# Altium PCB SensorsTeam5.PcbDoc
Units mm, origin at the board's own origin, x right, y up, seen from the top; angles counter-clockwise.
Board outline 119.38 x 95.25 mm, 2 copper layers (Top Layer, Bottom Layer); 68 components, 47 nets, 261 pads, 10 vias.
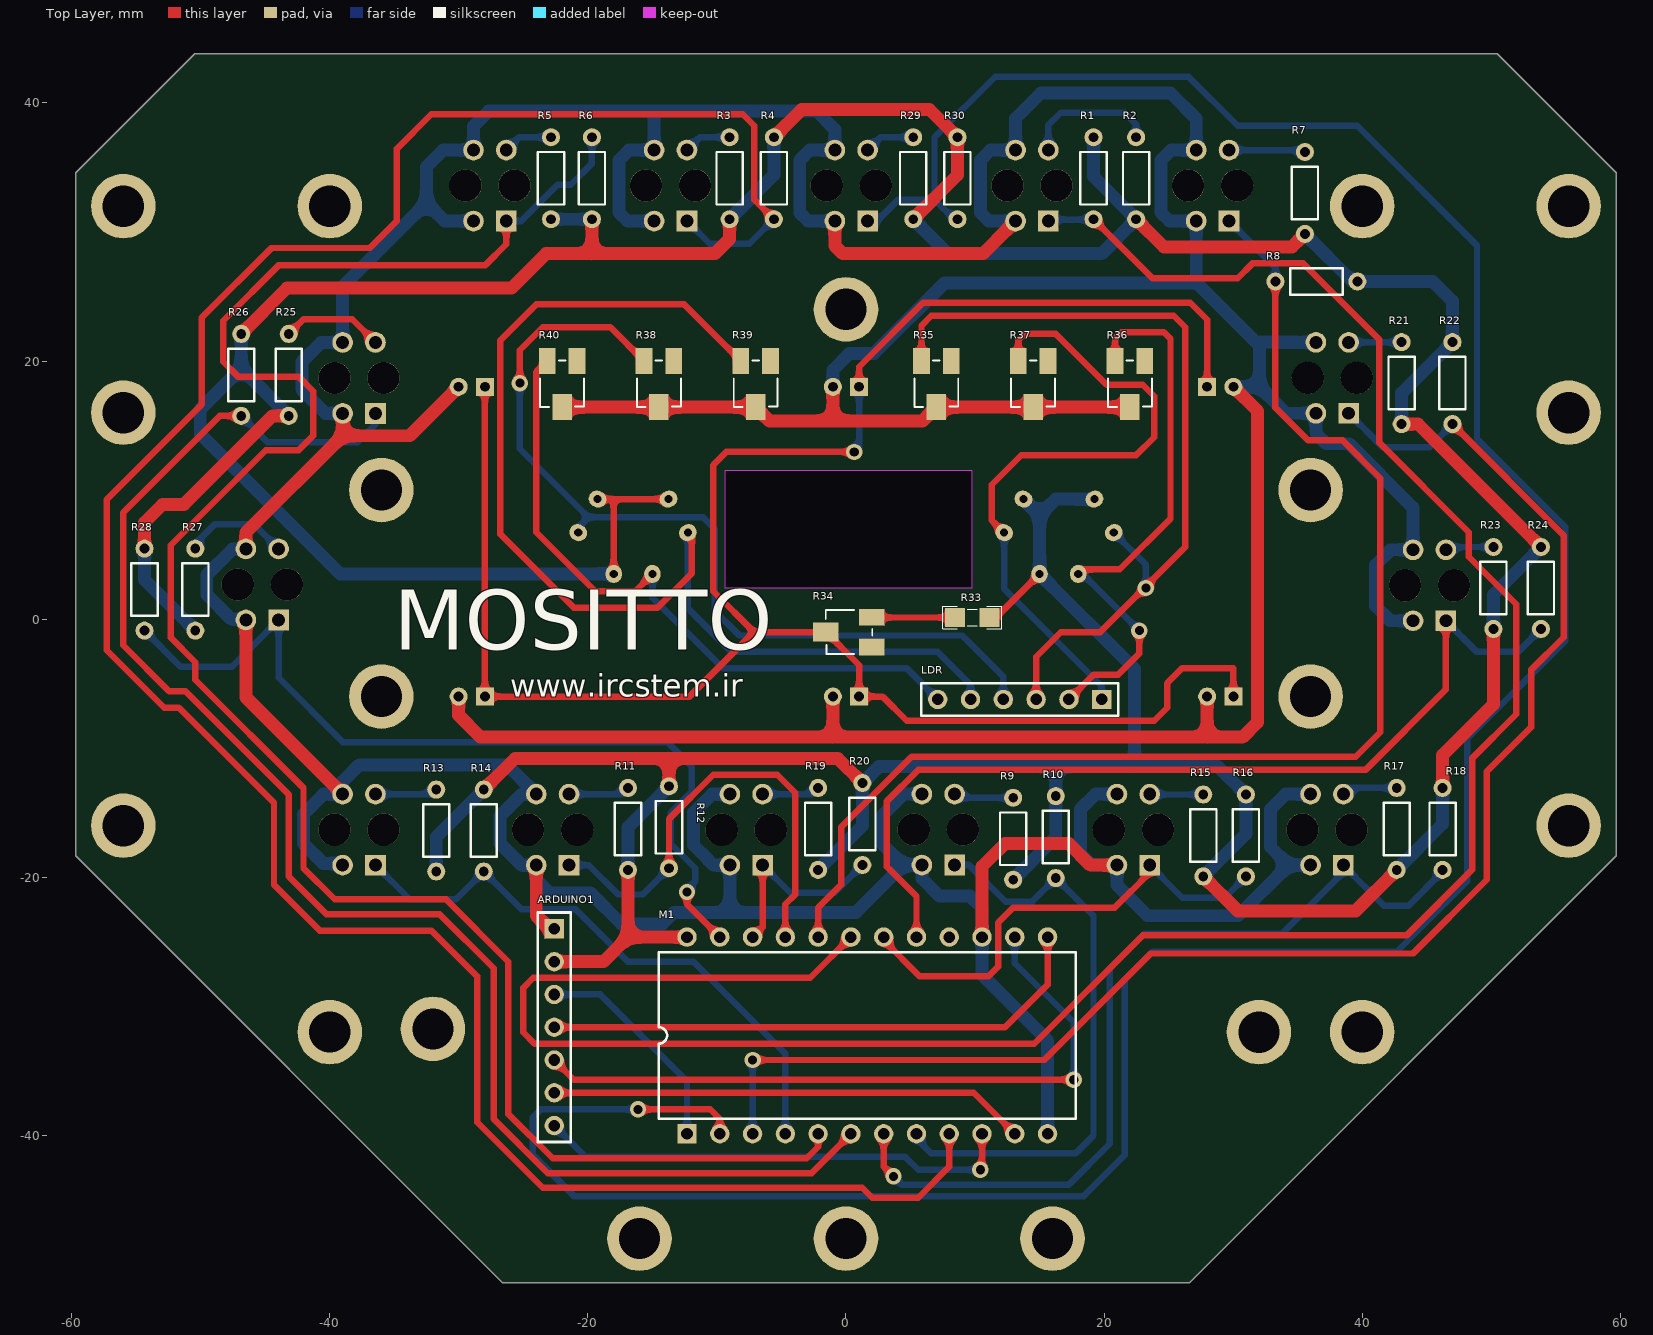
[diagram p0: Top Layer view]
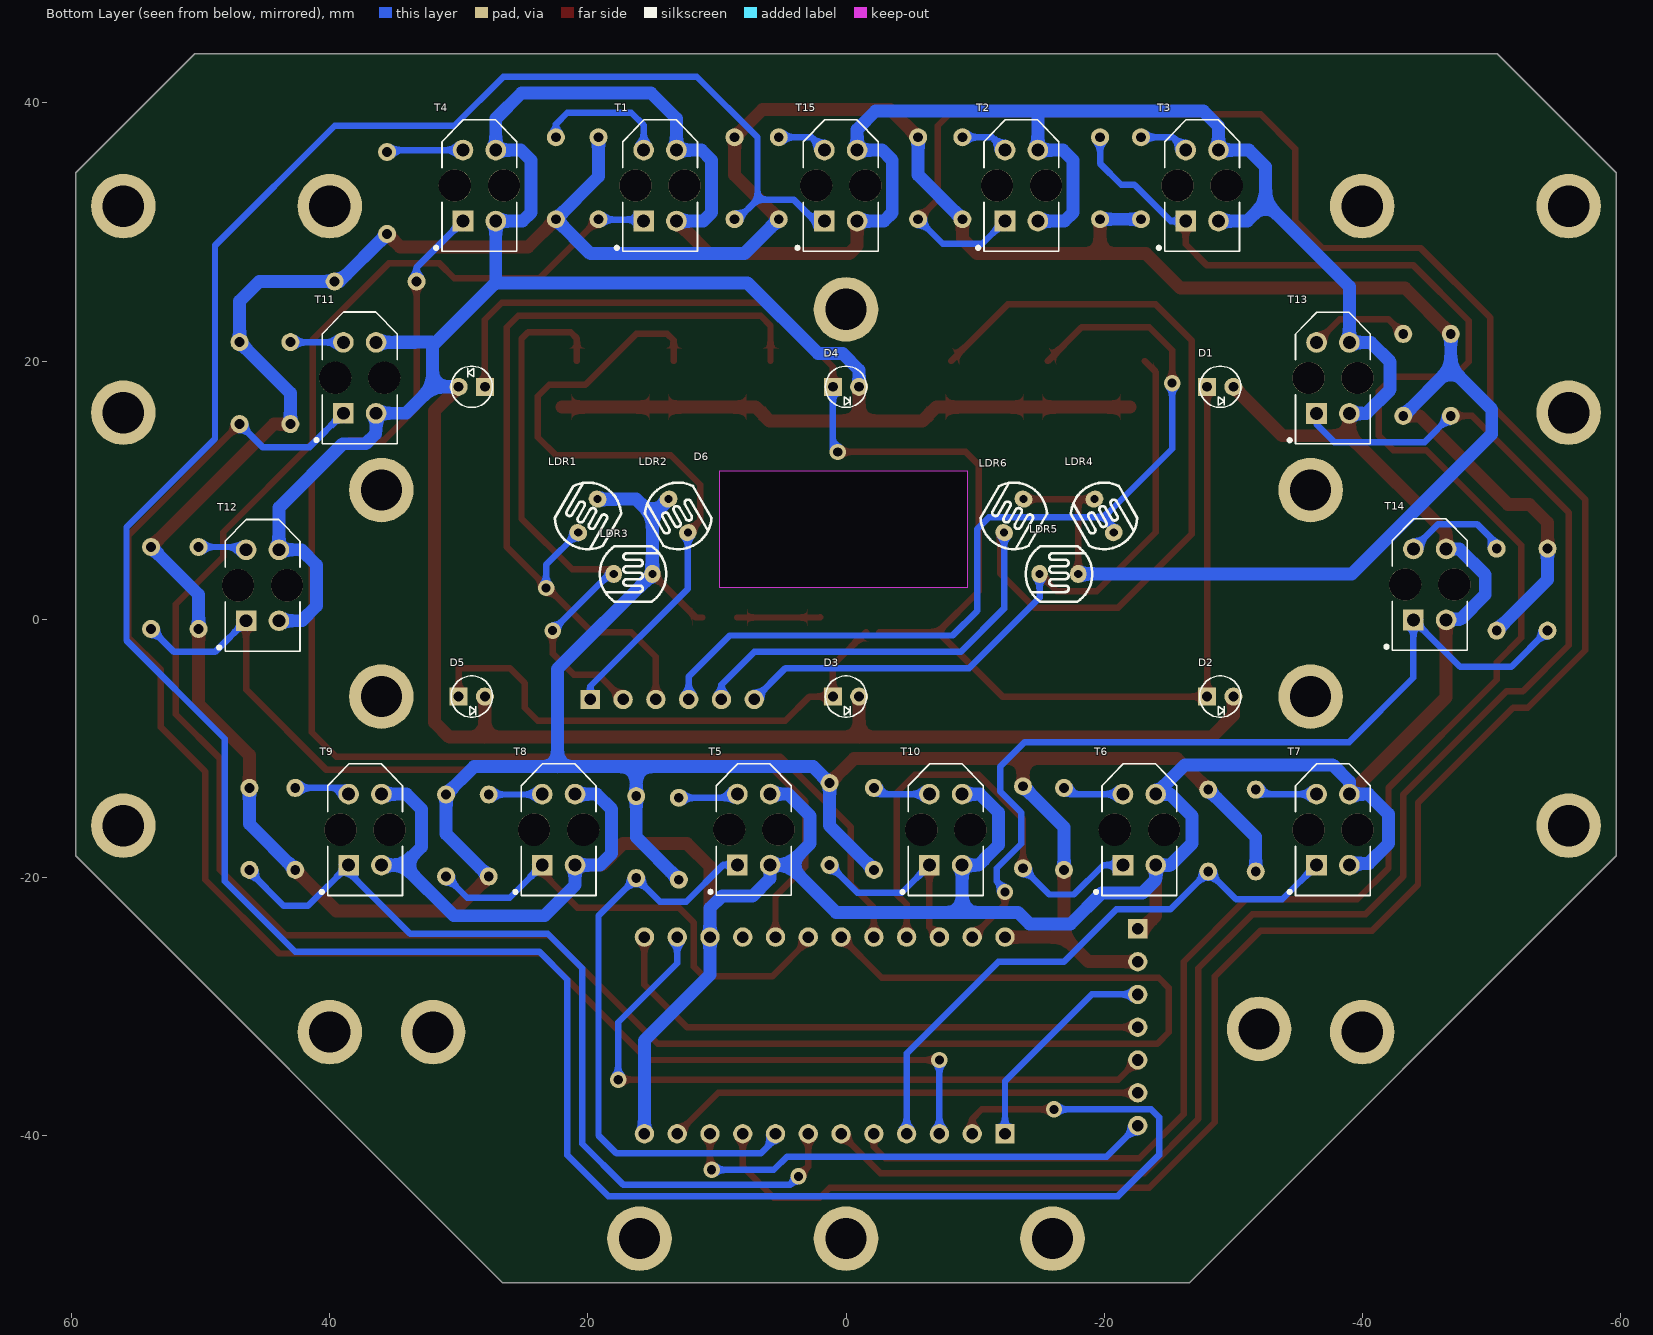
[diagram p1: Bottom Layer view, seen from below]
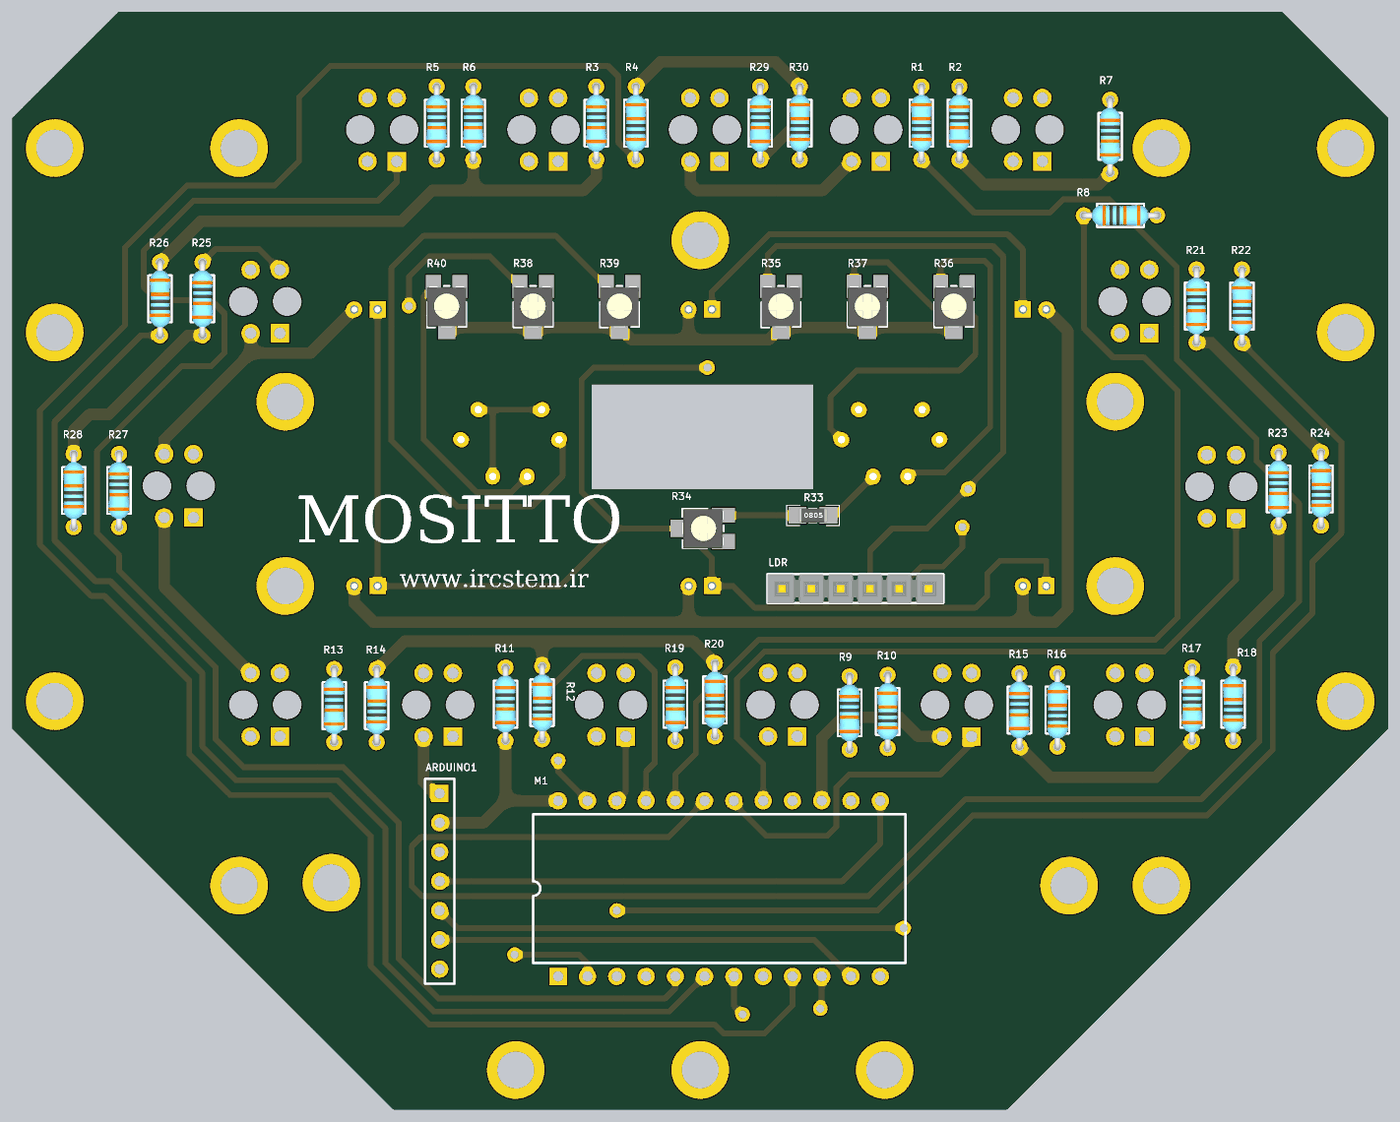
[diagram p2: 3D render of the assembled board from above, using the file's embedded part models]

## Layer stack, top to bottom
Top Solder: solder mask 0.0102, Solder Resist, Dk 3.5
Top Layer: signal copper 0.0356
Dielectric 1: dielectric 0.32, FR-4, Dk 4.8
Bottom Layer: signal copper 0.0356
Bottom Solder: solder mask 0.0102, Solder Resist, Dk 3.5

## Board outline
-59.653,-18.378 -26.634,-51.398 -26.633,-51.398 -26.634,-51.398 ccw(c-26.543,-51.308) -26.543,-51.435 26.543,-51.435 ccw(c26.543,-51.308) 26.634,-51.398 59.653,-18.378 ccw(c59.563,-18.288) 59.69,-18.288 59.69,34.544 ccw(c59.563,34.544) 59.653,34.635 59.653,34.634 50.509,43.778 50.51,43.778 ccw(c50.419,43.688) 50.419,43.815 -50.419,43.815 ccw(c-50.419,43.688) -50.51,43.778 -50.509,43.778 -59.653,34.634 -59.653,34.635 ccw(c-59.563,34.544) -59.69,34.544 -59.69,-18.288 ccw(c-59.563,-18.288)
cut-out: -9.398,2.413 9.779,2.413 9.779,11.493 -9.398,11.494

## Design rules (kind name [scope] priority, off if disabled: settings)
Clearance [All] p1: gap=0.254 ignorepadtopadclearanceinfootprint=FALSE except(0: Arc-Hole Track-Hole SMDPad-Hole THPad-Hole Via-Hole Fill-Hole Poly-Hole Region-Hole Text-Hole)
PolygonConnect [All] p1: connectstyle=Relief reliefconductorwidth=0.254 reliefentries=4 polygonreliefangle="90 Angle" airgapwidth=0.254
RoutingVias [All] p1: holewidth=0.711 width=1.27 viastyle="Through Hole" minholewidth=0.711 minwidth=1.27 maxholewidth=0.711 maxwidth=1.27
SolderMaskExpansion [All] p1: expansion=0.102
Width [All] p1: maxlimit=1 minlimit=0.254 preferedwidth=0.5 minimp=50.000000 maximp=50.000000 favimp=50.000000
30 further rules are at their usual default settings.

## Components (designator, comment, footprint, x,y, rotation, side; value= is the part's Value field where it differs from the comment)
ARDUINO1 "Header 7" HDR1X7 -22.606,-24.003 r270 top
D1 "LED3MM" LED3mm_GRN -29,18 r180 bottom
D2 "LED3MM" LED3mm_GRN -29,-6 r180 bottom
D3 "LED3MM" LED3mm_GRN 0,-6 r180 bottom
D4 "LED3MM" LED3mm_GRN 0,18 r180 bottom
D5 "LED3MM" LED3mm_GRN 29,-6 r180 bottom
D6 "LED3MM" LED3mm_GRN 29,18 r0 bottom
LDR "Header 6" HDR1X6 19.812,-6.223 r180 top
LDR1 "PhotoCell" PhotoCell 20,8 r120 bottom
LDR2 "PhotoCell" PhotoCell 13,8 r60 bottom
LDR3 "PhotoCell" PhotoCell 16.5,3.5 r180 bottom
LDR4 "PhotoCell" PhotoCell -20,8 r60 bottom
LDR5 "PhotoCell" PhotoCell -16.5,3.5 r180 bottom
LDR6 "PhotoCell" PhotoCell -13,8 r120 bottom
M1 "HCF4067BEY" PDIP24 1.651,-32.258 r0 top
R1 "10K" RES-(1/4) 19.177,34.163 r90 top
R2 "220" RES-(1/4) 22.479,34.163 r270 top
R3 "220" RES-(1/4) -9.017,34.163 r270 top
R4 "10K" RES-(1/4) -5.588,34.163 r90 top
R5 "220" RES-(1/4) -22.86,34.163 r270 top
R6 "10K" RES-(1/4) -19.685,34.163 r270 top
R7 "220" RES-(1/4) 35.56,33.02 r270 top
R8 "10K" RES-(1/4) 36.449,26.162 r0 top
R9 "220" RES-(1/4) 12.954,-17.018 r270 top
R10 "10K" RES-(1/4) 16.256,-16.891 r90 top
R11 "220" RES-(1/4) -16.891,-16.256 r270 top
R12 "10K" RES-(1/4) -13.716,-16.129 r90 top
R13 "220" RES-(1/4) -31.75,-16.383 r270 top
R14 "10K" RES-(1/4) -28.067,-16.383 r90 top
R15 "220" RES-(1/4) 27.686,-16.764 r270 top
R16 "10K" RES-(1/4) 30.988,-16.764 r90 top
R17 "220" RES-(1/4) 42.672,-16.256 r270 top
R18 "10K" RES-(1/4) 46.228,-16.256 r90 top
R19 "220" RES-(1/4) -2.159,-16.256 r270 top
R20 "10K" RES-(1/4) 1.27,-15.875 r90 top
R21 "220" RES-(1/4) 43.053,18.288 r270 top
R22 "10K" RES-(1/4) 46.99,18.288 r90 top
R23 "220" RES-(1/4) 50.165,2.413 r270 top
R24 "10K" RES-(1/4) 53.848,2.413 r90 top
R25 "220" RES-(1/4) -43.18,18.923 r270 top
R26 "10K" RES-(1/4) -46.863,18.923 r90 top
R27 "220" RES-(1/4) -50.419,2.286 r270 top
R28 "10K" RES-(1/4) -54.356,2.286 r90 top
R29 "220" RES-(1/4) 5.207,34.163 r270 top
R30 "10K" RES-(1/4) 8.636,34.163 r90 top
R33 "100" RESC3413X04N 9.779,0.127 r0 top
R34 "10K" "POT4MM-Small Pot" 0,-1 r180 top
R35 "10K" "POT4MM-Small Pot" 7,18 r270 top
R36 "10K" "POT4MM-Small Pot" 22,18 r270 top
R37 "10K" "POT4MM-Small Pot" 14.5,18 r270 top
R38 "10K" "POT4MM-Small Pot" -14.5,18 r270 top
R39 "10K" "POT4MM-Small Pot" -7,18 r270 top
R40 "10K" "POT4MM-Small Pot" -22,18 r270 top
T1 "TCRT500" TCRT5000 14,33.8 r90 bottom
T2 "TCRT500" TCRT5000 -14,33.8 r90 bottom
T3 "TCRT500" TCRT5000 -28,33.8 r90 bottom
T4 "TCRT500" TCRT5000 28,33.8 r90 bottom
T5 "TCRT500" TCRT5000 6.743,-16.102 r90 bottom
T6 "TCRT500" TCRT5000 -23.139,-16.11 r90 bottom
T7 "TCRT500" TCRT5000 -38.139,-16.11 r90 bottom
T8 "TCRT500" TCRT5000 21.861,-16.11 r90 bottom
T9 "TCRT500" TCRT5000 36.861,-16.11 r90 bottom
T10 "TCRT500" TCRT5000 -8.139,-16.11 r90 bottom
T11 "TCRT500" TCRT5000 37.274,18.902 r90 bottom
T12 "TCRT500" TCRT5000 44.806,2.826 r90 bottom
T13 "TCRT500" TCRT5000 -38.139,18.89 r90 bottom
T14 "TCRT500" TCRT5000 -45.639,2.89 r90 bottom
T15 "TCRT500" TCRT5000 0,33.8 r90 bottom

## Footprints (in the part's own frame and the unit in brackets; to place one, negate y for a bottom-side part, rotate by r counter-clockwise, add the part's x,y. Pads: shape width x height; smd on the part's side, far side on the other; paste and mask are expansions set on the pad)
HDR1X6 [mm] "Connector; Header; 6 Position"
  rect 1.5x1.5 hole 0.9: 1(0,0)
  round 1.5 hole 0.9: 2(2.54,0) 3(5.08,0) 4(7.62,0) 5(10.16,0) 6(12.7,0)
  silkscreen extent -1.27,-1.27 13.97,1.27, body extent -1.26,-1.25 13.98,1.29, height 8.38
HDR1X7 [mm] "Connector; Header; 7 Position"
  rect 1.5x1.5 hole 0.9: 1(0,0)
  round 1.5 hole 0.9: 2(2.54,0) 3(5.08,0) 4(7.62,0) 5(10.16,0) 6(12.7,0) 7(15.24,0)
  silkscreen extent -1.27,-1.27 16.51,1.27
LED3mm_GRN [mil]
  rect 55x55 hole 30: 1(-40,0)
  round 55 hole 30: 2(40,0)
  silkscreen extent -63,-63 63,63, body extent -69,-69 69,69, height 154
PDIP24 [mm] "DIP; 24 Leads; Row Spacing 15.24 mm; Pitch 2.54 mm"
  rect 1.5x1.5 hole 0.9: 1(-13.97,-7.62)
  round 1.5 hole 0.9: 2(-11.43,-7.62) 3(-8.89,-7.62) 4(-6.35,-7.62) 5(-3.81,-7.62) 6(-1.27,-7.62) 7(1.27,-7.62) 8(3.81,-7.62) 9(6.35,-7.62) 10(8.89,-7.62) 11(11.43,-7.62) 12(13.97,-7.62) 13(13.97,7.62) 14(11.43,7.62) 15(8.89,7.62) 16(6.35,7.62) 17(3.81,7.62) 18(1.27,7.62) 19(-1.27,7.62) 20(-3.81,7.62) 21(-6.35,7.62) 22(-8.89,7.62) 23(-11.43,7.62) 24(-13.97,7.62)
  silkscreen extent -16.15,-6.45 16.15,6.45
PhotoCell [mm]
  oval 1.27x1.397 hole 0.635: 1(-1.5,0) 2(1.5,0)
  silkscreen extent -2.58,-2.15 2.58,2.15, body extent -2.6,-2.16 2.61,2.14, height 2.44
"POT4MM-Small Pot" [mm] "Square Trimming Potentiometer"
  rect 2x1.3 smd: CCW(-2,-1.15) CW(-2,1.15)
  rect 2x1.5 smd: W(1.568,0)
  silkscreen extent -2.03,-1.7 1.57,1.7, body extent -2.03,-1.7 1.57,1.7, height 2
RES-(1/4) [mil]
  round 55 hole 30: 1(-125,0) 2(125,0)
  silkscreen extent -80,-40 80,40, body extent -135,-36 135,36, height 115
RESC3413X04N [mm] "Chip Resistor, 2-Leads, Body 3/40x1/30mm, IPC Medium Density-Design:Abbas Basereh"
  rect 1.55x1.45 smd: 1(-1.35,0) 2(1.35,0)
  silkscreen extent -2.29,-0.89 2.29,0.89, body extent -1.25,-0.62 1.25,0.62, height 0.79
TCRT5000 [mm]
  round 1.6 hole 1: A(2.547,1.676) E(-2.953,-0.864) K(2.547,-0.864)
  rect 1.6x1.6 hole 1: C(-2.953,1.676)
  round 2.5 hole 2.5 unplated: None(-0.203,-1.494) None(-0.203,2.306)
  silkscreen extent -5.3,-2.49 4.9,3.88

## Part data
ARDUINO1: "Header, 7-Pin", LatestRevisionDate=17-Jul-2002, LatestRevisionNote="Re-released for DXP Platform.", Publisher="Altium Limited"
D1 D2 D3 D4 D5 D6: library part "LED 3MM", "Light Emitting Diode", Designer="Ali Hafizi"
LDR: "Header, 6-Pin", LatestRevisionDate=17-Jul-2002, LatestRevisionNote="Re-released for DXP Platform.", Publisher="Altium Limited"
LDR1 LDR2 LDR3 LDR4 LDR5 LDR6: library part LDR, "Photo Cell- Variable Resistor With Light", Company="IPA CO.", Designer="Saeid Jorablo", Last Update Time=2008/07/17
M1: "Analog Multiplexer/Demultiplexer", ComponentLink1Description="Manufacturer Link", ComponentLink1URL=http://www.st.com/, DatasheetVersion=Sep-1988, LatestRevisionDate=06-Jun-2005, LatestRevisionNote="Stylized 3D Model Added.", PackageDescription="DIP; 24 Leads; Row Spacing 15.24 mm; Pitch 2.54 mm", PackageReference=PDIP24, PackageVersion=Jan-1995, Published=8-Jun-2000, Publisher="Altium Limited"
R1 R2 R3 R4 R5 R6 R7 R8 R9 R10 R11 R12 R13 R14 R15 R16 R17 R18 R19 R20 R21 R22 R23 R24 R25 R26 R27 R28 R29 R30 R33: library part "RES 0805 0.125W", "RES 0805", Data=16-12-2016, Desc.="RES SMD 0805", Designer="Abbas Basereh"
R34 R35 R36 R37 R38 R39 R40: library part "POT SMD", "Square Trimming Potentiometer", ComponentLink1Description="Manufacturer Link", ComponentLink1URL=http://bourns.com/2/search.html, DatasheetVersion=Oct-2003, PackageDescription="Square Trimming Potentiometer", PackageReference=POT4MM-2, Published=17-Dec-2003, Publisher="Altium Limited"
T1 T2 T3 T4 T5 T6 T7 T8 T9 T10 T11 T12 T13 T14 T15: library part TCRT5000

## Free pads (board coordinates)
  round 5 hole 3.2: 0(-56,-16) 0(-56,16) 0(-56,32) 0(-40,-32) 0(-40,32) 0(-36,-6) 0(-36,10) 0(-32.004,-31.752) 0(-16,-48) 0(0,-48) 0(0,24) 0(16,-48) 0(32,-32) 0(36,-6) 0(36,10) 0(40,-32) 0(40,32) 0(56,-16) 0(56,16) 0(56,32)
  round 4.5 hole 3.2: 0(-56,-16) 0(-56,16) 0(-56,32) 0(-40,32) 0(40,32) 0(56,16) 0(56,32)

## Via types
v1: diameter 1.27, hole 0.711, Top Layer to Bottom Layer, 10 vias

## Nets (pads, with @x,y where several pads share a name; then routed paths per layer and width w, separated by ;. In a path a pad name is that pad's centre, name@x,y a point inside that pad or via, vN(x,y) a via of type N, cw(c..) or ccw(c..) an arc to the next point about the centre after c; other vN are vias at no path point)
1: M1.4 R14.1 T7.C | length 45.8
  Bottom Layer w0.5: T7.C -33.809,-21.717 -30.226,-21.717 R14.1 -25.146,-22.479 -20.955,-22.479 -16.891,-26.543 -11.811,-26.543 -4.699,-33.655 M1.4
2: M1.3 R22.1 T11.C | length 119.6
  Top Layer w0.5: v1(-7.239,-34.163) 15.367,-34.163 23.622,-25.908 43.942,-25.908 49.657,-20.193 49.657,-11.811 53.086,-8.382 53.086,-3.937 55.626,-1.397 55.626,6.477 R22.1
  Bottom Layer w0.5: M1.3 v1(-7.239,-34.163) ; T11.C 41.565,13.335 45.212,13.335 R22.1
3: M1.2 R30.1 T15.C | length 228.8
  Top Layer w0.5: v1(-16.113,-37.989) -10.525,-37.989 -9.779,-38.735 M1.2
  Bottom Layer w0.5: v1@-16.002,-38.1 v1(-16.113,-37.989) -23.638,-37.989 -24.257,-38.608 -24.257,-41.529 -21.082,-44.704 18.415,-44.704 21.59,-41.529 21.59,-27.94 23.75,-25.78 42.673,-25.78 48.133,-20.32 48.133,-9.271 55.753,-1.651 55.753,7.112 48.895,13.97 48.895,28.956 39.624,38.227 30.353,38.227 26.543,42.037 11.557,42.037 6.858,37.338 6.858,32.512 ; T15.C 2.399,30.847 4.064,32.512 6.858,32.512 ; R30.1 8.382,30.988 6.858,32.512
4: M1.23 R28.1 T14.C | length 68.7
  Top Layer w0.5: v1@-12.446,-20.955 -12.319,-21.082 v1(-12.319,-21.145) -12.319,-22.098 M1.23
  Bottom Layer w0.5: R28.1 -51.562,-3.683 -47.582,-3.683 T14.C -43.963,-4.551 -38.989,-9.525 -13.843,-9.525 -11.938,-11.43 -11.938,-13.335 -13.589,-14.986 -13.589,-17.399 -11.684,-19.304 -11.684,-20.32 -12.319,-20.955 v1(-12.319,-21.145)
5: M1.22 R20.1 T10.C | length 15.4
  Top Layer w0.5: M1.22 -6.463,-23.862 T10.C
  Bottom Layer w0.5: T10.C -4.317,-21.209 -0.889,-21.209 R20.1
6: M1.21 R12.1 T6.C | length 36.9
  Top Layer w0.5: R12.1 -13.716,-15.494 -10.287,-12.065 -5.334,-12.065 -3.937,-13.462 -3.937,-21.336 -4.699,-22.098 M1.21 M1.21@-4.699,-24.892
  Bottom Layer w0.5: T6.C -19.926,-19.063 -17.653,-21.336 -15.748,-21.336 R12.1
7: M1.20 R8.1 T4.C | length 100.1
  Top Layer w0.5: M1.20 -2.159,-22.352 -0.381,-20.574 -0.381,-16.129 5.08,-10.668 39.497,-10.668 41.402,-8.763 41.402,10.922 38.481,13.843 35.814,13.843 33.274,16.383 R8.1
  Bottom Layer w0.5: T4.C 33.274,27.249 R8.1
8: M1.19 R1.1 T1.C | length 187.3
  Top Layer w0.5: M1.19 -2.778,-27.797 -24.241,-27.797 -25.019,-28.575 -25.019,-32.02 -24.13,-32.909 14.589,-32.909 22.987,-24.511 43.434,-24.511 48.514,-19.431 48.514,-10.795 51.943,-7.366 51.943,1.143 48.26,4.826 48.26,6.731 41.335,13.656 41.335,21.657 35.433,27.559 31.496,27.559 30.353,26.416 23.749,26.416 R1.1
  Bottom Layer w0.5: T1.C@15.676,30.949 R1.1@19.177,30.949
9: M1.18 R16.1 T8.C | length 37.2
  Top Layer w0.5: M1.18@2.921,-24.511 M1.18 2.921,-24.892 5.715,-27.686 11.033,-27.686 11.795,-26.924 11.795,-23.511 12.954,-22.352 20.828,-22.352 23.537,-19.643 T8.C
  Bottom Layer w0.5: T8.C 26.064,-21.59 29.337,-21.59 R16.1
10: M1.17 R24.1 T12.C | length 72.8
  Top Layer w0.5: M1.17 5.461,-21.463 3.175,-19.177 3.175,-14.097 5.588,-11.684 40.259,-11.684 46.482,-5.461 T12.C
  Bottom Layer w0.5: T12.C 48.895,-2.54 52.07,-2.54 R24.1
11: M1.16
+5: ARDUINO1.2 LDR1.2 LDR2.2 LDR3.2 LDR4.2 LDR5.2 LDR6.2 M1.24 R1.2 R2.2 R3.2 R4.2 R5.2 R6.2 R7.2 R8.2 R9.2 R10.2 R11.2 R12.2 R13.2 R14.2 R15.2 R16.2 R17.2 R18.2 R19.2 R20.2 R21.2 R22.2 R23.2 R24.2 R25.2 R26.2 R27.2 R28.2 R29.2 R30.2 R33.2 | length 450.8
  Top Layer w0.5: LDR4.2 -18,9.299 ; LDR5.2 -18,9.299 ; LDR6.2 -18,9.299 ; R33.2 11.627,0.127 LDR3.2
  Top Layer w1: R28.2 -54.356,7.493 -52.959,8.89 -51.308,8.89 -44.45,15.748 R25.2 ; R26.2 -43.307,25.654 -25.908,25.654 -23.241,28.321 -19.685,28.321 ; R14.2 -25.654,-10.795 -13.716,-10.795 ; ARDUINO1.2 -18.796,-26.543 -16.891,-24.638 ; R6.2 -19.685,28.321 ; R11.2 -16.891,-24.638 ; R12.2 -13.716,-10.795 ; M1.24 -16.891,-24.638 ; R3.2 -9.017,29.464 -10.16,28.321 -19.685,28.321 ; R4.2 -3.429,39.497 6.477,39.497 R30.2 8.636,34.417 R29.2 ; R20.2 -0.635,-10.795 -13.716,-10.795 ; R2.2 24.638,28.829 34.544,28.829 R7.2 ; R15.2 30.353,-22.606 39.497,-22.606 R17.2 ; R21.2 44.323,15.113 R24.2 ; R18.2 46.228,-10.541 50.165,-6.604 R23.2
  Bottom Layer w1: R28.2 -54.356,3.048 R27.2 ; R26.2 -46.863,19.431 ; R25.2 -46.863,19.431 ; R13.2 -31.75,-16.891 R14.2 ; R5.2 R6.2 ; LDR5.2 -39.187,3.5 -50.038,14.351 -50.038,16.256 -46.863,19.431 ; R11.2 -16.891,-16.129 R12.2 ; R3.2 -5.588,34.417 R4.2 ; R19.2 1.27,-16.002 R20.2 2.54,-11.43 16.256,-11.43 ; R29.2 7.874,28.321 19.812,28.321 R2.2 19.177,34.29 R1.2@19.177,36.83 ; R9.2 16.256,-16.891 R10.2 16.256,-11.43 ; LDR2.2 15,8.049 ; LDR1.2 16.25,9.299 15,8.049 ; R15.2 30.988,-16.637 R16.2 28.829,-11.43 22.352,-11.43 ; R7.2@35.623,29.781 39.243,26.162 R8.2 45.466,26.162 46.99,24.638 R22.2 43.053,17.526 R21.2 ; R17.2 46.228,-15.875 R18.2 ; R23.2 50.165,1.905 R24.2 ; 15,8.049 LDR3.2 22.352,-3.852 22.352,-11.43 ; 16.256,-11.43 22.352,-11.43
com: ARDUINO1.3 M1.1 | length 17.1
  Bottom Layer w0.5: ARDUINO1.3 -19.05,-29.083 -12.319,-35.814 M1.1
GND: ARDUINO1.1 D1.2 D2.2 D3.2 D4.2 D5.2 D6.2 M1.12 M1.15 R35.W R36.W R37.W R38.W R39.W R40.W T1.E T1.K T2.E T2.K T3.E T3.K T4.E T4.K T5.E T5.K T6.E T6.K T7.E T7.K T8.E T8.K T9.E T9.K T10.E T10.K T11.E T11.K T12.E T12.K T13.E T13.K T14.E T14.K T15.E T15.K | length 606.2
  Top Layer w1: T14.E -46.503,-6.063 T7.K ; T14.K -46.503,6.71 -39.003,14.21 ; T13.E -39.003,14.21 ; D2.2 -30.016,-7.449 -28.321,-9.144 -1.016,-9.144 ; D1.2 -33.806,14.21 -39.003,14.21 ; T6.E -24.003,-22.987 -22.987,-24.003 ARDUINO1.1 ; R40.W R38.W R39.W -5.935,15.367 -1.016,15.367 ; D3.2 -1.016,-9.144 ; D4.2 -1.016,15.367 ; T15.E -0.864,28.931 -0.254,28.321 10.611,28.321 T1.E@12.612,30.322 ; M1.15 10.541,-19.177 12.319,-17.399 17.272,-17.399 18.936,-19.063 T8.E ; R36.W R37.W R35.W 5.935,15.367 -1.016,15.367 ; D5.2 27.984,-9.144 ; D6.2 31.877,16.139 31.877,-8.001 30.734,-9.144 27.984,-9.144 ; -1.016,-9.144 27.984,-9.144
  Bottom Layer w1: T14.E -46.566,0 -47.625,0 -49.53,1.905 -49.53,3.429 -47.522,5.437 T14.K ; T7.E -39.143,-18.923 -40.513,-18.923 -42.037,-17.399 -42.037,-15.113 -40.487,-13.563 T7.K -39.003,-12.587 -37.707,-11.291 -26.275,-11.291 T6.K -25.12,-13.563 -26.797,-15.24 -26.797,-17.399 -25.133,-19.063 T6.E -24.003,-20.193 -22.987,-21.209 -19.812,-21.209 -17.399,-23.622 -14.232,-23.622 -13.343,-22.733 -9.003,-22.733 ; T13.E -40.321,15.937 -42.164,17.78 -42.164,19.939 -40.666,21.437 T13.K -39.003,25.767 -32.512,32.258 ; T3.E -31.101,30.847 -32.512,32.258 ; T2.E -16.937,30.847 -17.586,31.496 -17.586,35.56 -16.799,36.347 T2.K -14.864,39.365 -14.859,39.37 ; T10.K -10.388,-13.563 -11.811,-14.986 -11.811,-17.503 -10.68,-18.634 -10.68,-18.657 -10.274,-19.063 T10.E -9.003,-22.733 ; D4.2 -1.016,19.304 0.254,20.574 2.159,20.574 7.62,26.035 27.178,26.035 27.136,26.077 T4.E 25.063,30.847 24.414,31.496 24.414,35.56 25.201,36.347 T4.K 27.136,38.777 25.146,40.767 15.113,40.767 13.136,38.79 T1.K 11.201,36.347 10.414,35.56 10.414,31.496 11.063,30.847 T1.E ; T15.E -2.937,30.847 -3.586,31.496 -3.586,35.56 -2.799,36.347 T15.K -0.864,37.948 -2.286,39.37 -14.859,39.37 ; T5.K@5.882,-13.55 4.484,-13.55 2.794,-15.24 2.794,-17.399 4.445,-19.05 ; M1.12 15.621,-32.639 10.541,-27.559 M1.15 10.541,-22.392 9.612,-21.463 7.239,-21.463 5.882,-20.106 5.882,-19.05 4.445,-19.05 ; T8.K 19.33,-13.563 18.161,-14.732 18.161,-18.161 19.063,-19.063 T8.E 20.997,-20.616 23.368,-22.987 30.379,-22.987 34.303,-19.063 ; 27.327,25.886 32.038,21.175 32.038,18 ; D6.2 32.038,18 ; 32.131,21.463 33.401,21.463 ; 34.925,21.463 33.401,21.463 ; T9.E 34.303,-19.063 ; T9.K 34.062,-13.563 32.893,-14.732 32.893,-17.653 34.303,-19.063 ; T11.E T11.E@36.284,15.949 ; T11.K 33.415,21.449 33.401,21.463 ; T12.E 42.164,-0.127 41.021,1.016 41.021,4.191 42.203,5.373 T12.K 43.942,8.636 38.989,13.589 37.211,13.589 36.457,14.343 36.285,15.935 T11.E@36.284,15.949 ; -32.512,32.258 -32.512,35.052 -31.217,36.347 T3.K -28.864,38.192 -27.686,39.37 -14.859,39.37 ; -9.003,-22.733 0.762,-22.733 4.445,-19.05 ; 32.038,18 34.089,15.949 T11.E@36.284,15.949
NetARDUINO1_4: ARDUINO1.4 M1.13 | length 43.3
  Top Layer w0.5: ARDUINO1.4 12.319,-31.623 15.621,-28.321 M1.13
NetARDUINO1_5: ARDUINO1.5 M1.14 | length 53.8
  Top Layer w0.5: ARDUINO1.5 -21.086,-35.683 17.657,-35.683 v1(17.653,-35.687)
  Bottom Layer w0.5: M1.14 13.081,-26.67 17.653,-31.242 v1(17.653,-35.687)
NetARDUINO1_6: ARDUINO1.6 M1.11 | length 37
  Top Layer w0.5: ARDUINO1.6 9.906,-36.703 M1.11
NetARDUINO1_7: ARDUINO1.7 M1.10 | length 37.3
  Top Layer w0.5: v1(10.414,-42.672) 10.541,-42.545 M1.10
  Bottom Layer w0.5: ARDUINO1.7 -20.193,-41.656 4.572,-41.656 5.588,-42.672 v1(10.414,-42.672)
NetD1_1: D1.1 D2.1 D3.1 D4.1 D5.1 D6.1 R34.W | length 159.4
  Top Layer w0.5: D1.1 D2.1 -12.128,-6 -7.128,-1 ; R34.W@-2.568,-1 -7.128,-1 ; R34.W 1.016,-3.584 D3.1 2.825,-6 4.699,-7.874 23.876,-7.874 24.892,-6.858 24.892,-4.953 26.035,-3.81 30.016,-3.81 D5.1 ; v1(0.635,12.954) -9.271,12.954 -10.287,11.938 -10.287,2.159 -7.128,-1 ; D4.1 1.016,19.558 5.969,24.511 26.67,24.511 27.984,23.197 D6.1
  Bottom Layer w0.5: v1(0.635,12.954) 1.016,13.335 D4.1
NetLDR1_1: LDR1.1 LDR.3 R35.CCW | length 66.2
  Top Layer w0.5: R35.CCW 5.85,22.741 6.612,23.503 25.392,23.503 26.289,22.606 26.289,5.588 22.084,1.383 ; LDR.3 14.732,-2.921 16.637,-1.016 19.685,-1.016 22.084,1.383 ; v1(23.241,2.413) 23.114,2.413 22.084,1.383
  Bottom Layer w0.5: LDR1.1 23.241,4.21 v1(23.241,2.413)
NetLDR2_1: LDR2.1 LDR.1 R37.CCW | length 51.8
  Top Layer w0.5: LDR2.1 11.303,7.648 11.303,10.414 13.589,12.7 22.479,12.7 23.876,14.097 23.876,17.272 22.987,18.161 20.193,18.161 16.256,22.098 13.843,22.098 13.35,21.605 R37.CCW
  Bottom Layer w0.5: LDR2.1 12.25,2.355 19.812,-5.207 LDR.1
NetLDR3_1: LDR3.1 LDR.2 R36.CCW | length 44.6
  Top Layer w0.5: LDR.2 19.177,-4.318 21.082,-4.318 22.733,-2.667 v1(22.733,-0.889) ; LDR3.1 18.355,3.855 21.222,3.855 25.146,7.779 25.146,21.717 24.638,22.225 21.336,22.225 20.85,21.739 R36.CCW
  Bottom Layer w0.5: LDR3.1 18.344,3.5 v1(22.733,-0.889)
NetLDR4_1: LDR4.1 LDR.4 R38.CCW | length 71
  Top Layer w0.5: v1(-25.273,18.288) -25.273,20.828 -23.495,22.606 -18.256,22.606 R38.CCW
  Bottom Layer w0.5: v1(-25.273,18.288) -25.273,13.208 -19.966,7.901 ; LDR4.1 -20.75,7.116 -19.966,7.901 ; -20.066,7.901 -19.966,7.901 ; LDR.4 12.192,-4.445 9.017,-1.27 -8.255,-1.27 -10.16,0.635 -10.16,6.985 -11.076,7.901 -19.966,7.901
NetLDR5_1: LDR5.1 LDR.6 R40.CCW | length 52.3
  Top Layer w0.5: R40.CCW -24.003,19.147 -24.003,6.731 -19.431,2.159 -16.341,2.159 LDR5.1
  Bottom Layer w0.5: LDR5.1 -15,1.665 -9.543,-3.792 4.681,-3.792 LDR.6
NetLDR6_1: LDR6.1 LDR.5 R39.CCW | length 89.6
  Top Layer w0.5: LDR6.1 -11.938,6.389 -11.938,3.556 -14.605,0.889 -21.082,0.889 -26.782,6.589 -26.782,18.907 -26.797,18.923 -26.797,21.59 -24.003,24.384 -12.534,24.384 R39.CCW
  Bottom Layer w0.5: LDR6.1 -12.25,0.82 -8.89,-2.54 7.112,-2.54 9.652,-5.08 LDR.5
NetM1_5: M1.5 R6.1 T3.C | length 152.6
  Top Layer w0.5: T3.C -26.324,29.048 -27.94,27.432 -43.942,27.432 -48.26,23.114 -48.26,19.939 -47.117,18.796 -42.418,18.796 -41.275,17.653 -41.275,14.224 -42.418,13.081 -44.958,13.081 -52.324,5.715 -52.324,-1.429 -50.419,-3.334 -50.419,-4.699 -42.037,-13.081 -42.037,-19.304 -39.624,-21.717 -30.988,-21.717 -26.162,-26.543 -26.162,-38.354 -22.733,-41.783 -3.048,-41.783 -2.159,-40.894 M1.5
  Bottom Layer w0.5: T3.C -25.16,30.847 -22.352,33.655 -21.336,33.655 -19.685,35.306 R6.1
NetM1_6: M1.6 R26.1 T13.C | length 120.3
  Top Layer w0.5: R26.1 -48.514,15.748 -56.007,8.255 -56.007,-2.032 -52.451,-5.588 -51.181,-5.588 -43.18,-13.589 -43.18,-19.939 -40.259,-22.86 -31.496,-22.86 -27.305,-27.051 -27.305,-38.735 -23.114,-42.926 -2.667,-42.926 M1.6
  Bottom Layer w0.5: R26.1 -44.831,13.716 -37.846,13.716 -36.463,15.099 T13.C
NetM1_7: M1.7 R18.1 T9.C | length 67.5
  Top Layer w0.5: M1.7 2.921,-42.418 v1(3.683,-43.18)
  Bottom Layer w0.5: v1(3.683,-43.18) 4.318,-43.815 17.272,-43.815 20.447,-40.64 20.447,-27.051 23.114,-24.384 33.782,-24.384 38.537,-19.629 T9.C 41.699,-22.225 43.561,-22.225 46.228,-19.558 R18.1
NetM1_8: M1.8 R10.1 T5.C | length 46.1
  Bottom Layer w0.5: M1.8 5.461,-40.259 6.604,-41.402 17.78,-41.402 19.177,-40.005 19.177,-22.987 R10.1 14.414,-21.907 12.383,-21.907 9.525,-19.05 T5.C@8.422,-19.05
NetM1_9: M1.9 R4.1 T2.C | length 195.1
  Top Layer w0.5: R4.1 -7.112,32.512 -7.112,38.227 -8.001,39.116 -32.131,39.116 -34.798,36.449 -34.798,30.861 -36.9,28.759 -44.52,28.759 -49.911,23.368 -49.911,16.637 -57.277,9.271 -57.277,-2.413 -52.832,-6.858 -51.689,-6.858 -44.323,-14.224 -44.323,-20.574 -40.767,-24.13 -32.131,-24.13 -28.575,-27.686 -28.575,-38.989 -23.495,-44.069 1.27,-44.069 2.032,-44.831 5.588,-44.831 8.001,-42.418 M1.9
  Bottom Layer w0.5: T2.C@-12.639,31.162 T2.C -10.56,29.083 -7.493,29.083 R4.1
NetR2_1: R2.1 T1.A | length 10.5
  Bottom Layer w0.5: T1.A 15.676,38.282 16.637,39.243 21.59,39.243 22.479,38.354 R2.1
NetR3_1: R3.1 T2.A | length 3.7
  Bottom Layer w0.5: T2.A -11.332,37.338 R3.1
NetR5_1: R5.1 T3.A | length 3.9
  Bottom Layer w0.5: T3.A -25.332,37.338 R5.1
NetR7_1: R7.1 T4.A | length 5.9
  Bottom Layer w0.5: T4.A 35.408,36.347 R7.1
NetR9_1: R9.1 T5.A | length 4.7
  Bottom Layer w0.5: T5.A@8.422,-13.55 8.715,-13.843 R9.1
NetR11_1: R11.1 T6.A | length 4.8
  Bottom Layer w0.5: T6.A -17.373,-13.563 R11.1
NetR13_1: R13.1 T7.A | length 4.9
  Bottom Layer w0.5: T7.A -32.105,-13.563 R13.1
NetR15_1: R15.1 T8.A | length 4.2
  Bottom Layer w0.5: T8.A 23.563,-13.589 R15.1
NetR17_1: R17.1 T9.A | length 4.3
  Bottom Layer w0.5: T9.A 39.02,-13.081 R17.1
NetR19_1: R19.1 T10.A | length 4.5
  Bottom Layer w0.5: T10.A -2.641,-13.563 R19.1
NetR21_1: R21.1 T11.A | length 4.1
  Bottom Layer w0.5: T11.A 43.039,21.449 R21.1
NetR23_1: R23.1 T12.A | length 3.8
  Bottom Layer w0.5: T12.A 46.697,5.588 R23.1
NetR25_1: R25.1 T13.A | length 7.9
  Top Layer w0.5: R25.1 -42.037,23.241 -38.267,23.241 T13.A
NetR27_1: R27.1 T14.A | length 8.3
  Bottom Layer w0.5: R27.1 -50.419,5.969 -50.292,5.969 -48.895,7.366 -45.892,7.366 T14.A
NetR29_1: R29.1 T15.A | length 3.9
  Bottom Layer w0.5: T15.A 2.668,37.338 R29.1
NetR31_1: 
NetR33_1: R33.1 R34.CCW | length 6.4
  Top Layer w0.5: R34.CCW 2.023,0.127 R33.1
pads on no net: R34.CW R35.CW R36.CW R37.CW R38.CW R39.CW R40.CW T1.None T2.None T3.None T4.None T5.None T6.None T7.None T8.None T9.None T10.None T11.None T12.None T13.None T14.None T15.None

## Silkscreen, mask and mechanical layers (free items; w line width, h text height)
Top Overlay:
  text "MOSITTO" at -35.052,-3.937 h8
  text "www.ircstem.ir" at -26.035,-6.604 h3
Mechanical 1:
  lines w0.254: -59.563,-18.288 -26.543,-51.308 0,-51.308 26.543,-51.308 59.563,-18.288 59.563,34.544 50.419,43.688 0,43.688 -50.419,43.688 -59.563,34.544 -59.563,-18.288